# Altium PCB 电流环PCB.PcbDoc
Units mil, origin at the board's own origin, x right, y up, seen from the top; angles counter-clockwise.
Board outline 2585.03 x 1559.03 mil, 2 copper layers (Top Layer, Bottom Layer); 23 components, 15 nets, 75 pads, 0 vias.
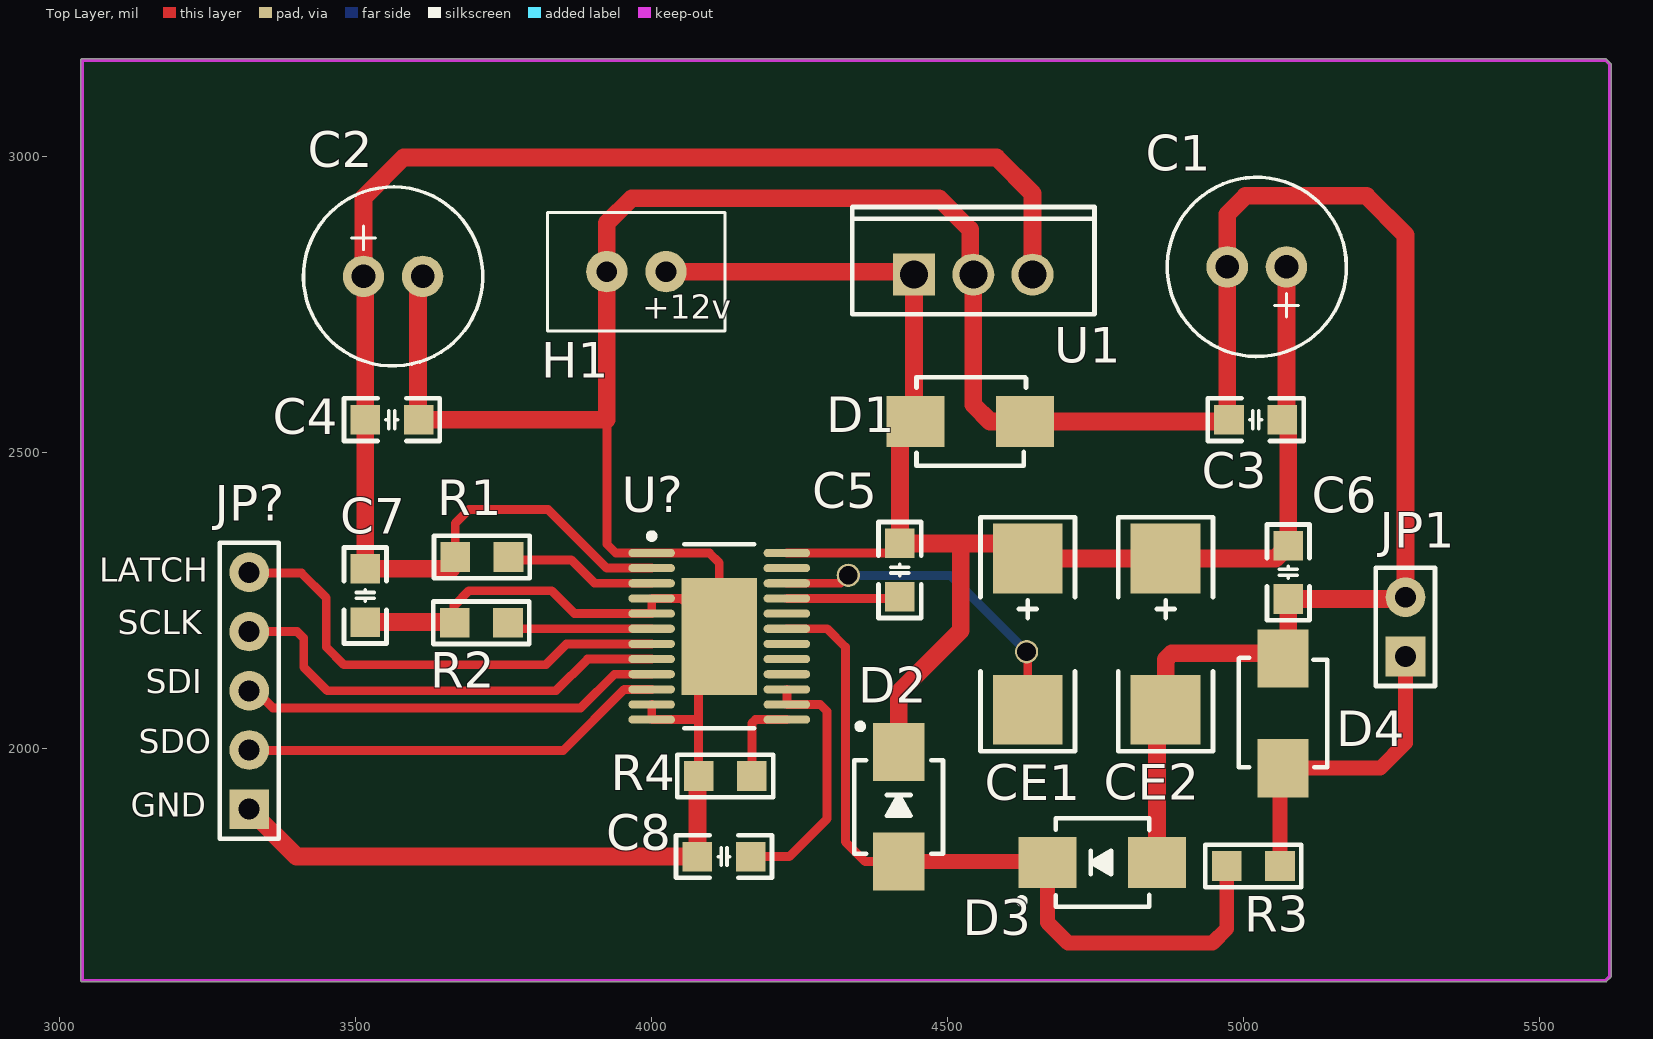
[diagram p0: Top Layer view]
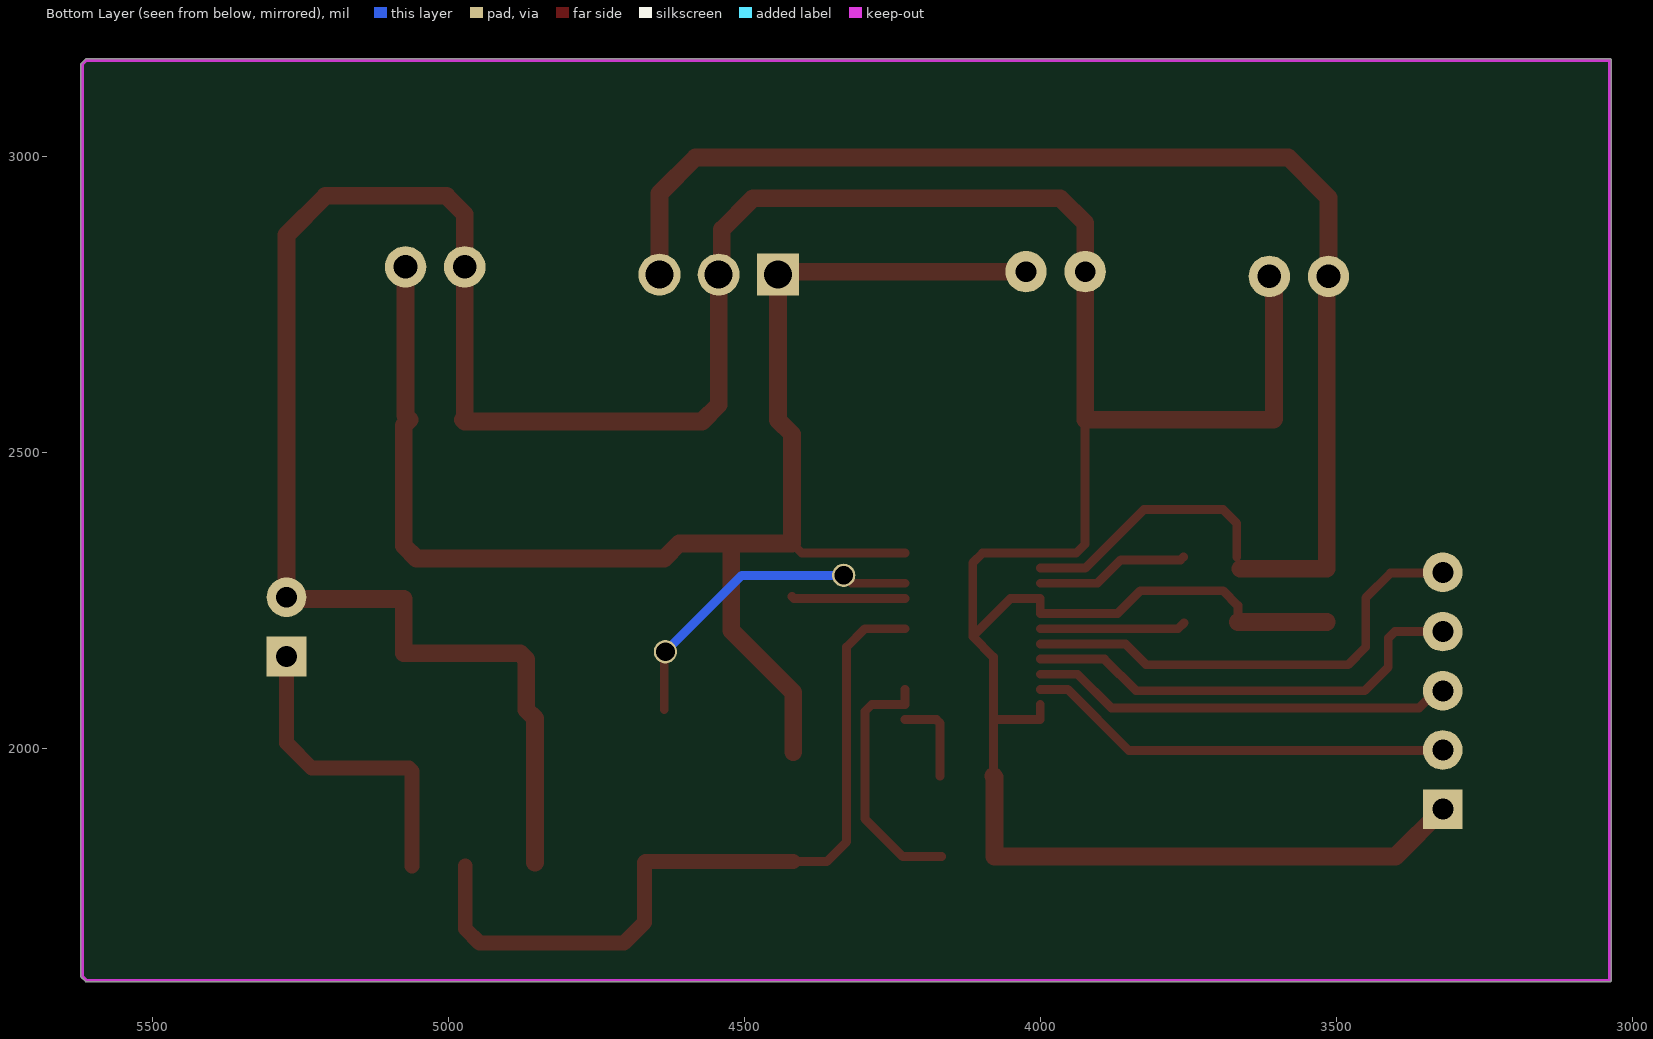
[diagram p1: Bottom Layer view, seen from below]

## Layer stack, top to bottom
Top Layer: signal copper 1.4
Dielectric: dielectric 12.6, FR-4, Dk 4.8
Bottom Layer: signal copper 1.4

## Board outline
3036.49,1609 ccw(c3039,1609) 3039,1606.48 5612,1606.48 ccw(c5612,1609) 5613.78,1607.22 5620.78,1614.22 ccw(c5619,1616) 5621.52,1616 5621.52,3156 ccw(c5619,3156) 5620.78,3157.78 5613.78,3164.78 ccw(c5612,3163) 5612,3165.51 3039,3165.51 ccw(c3039,3163) 3036.49,3163

## Design rules (kind name [scope] priority, off if disabled: settings)
Clearance [All] p1: gap=10
PolygonConnect [All] p1: connectstyle=Relief reliefconductorwidth=10 reliefentries=4 polygonreliefangle="90 Angle" airgapwidth=10
RoutingVias [All] p1: holewidth=28 width=50 viastyle="Through Hole" minholewidth=28 minwidth=50 maxholewidth=28 maxwidth=50
SolderMaskExpansion [All] p1: expansion=4
Width Width_1 [InNetClass('ELSE')] p1: maxlimit=25 minlimit=15 preferedwidth=15 minimp=50.000000 maximp=50.000000 favimp=50.000000
Width [InNetClass('POWER')] p2: maxlimit=30 minlimit=15 preferedwidth=30 minimp=50.000000 maximp=50.000000 favimp=50.000000
28 further rules are at their usual default settings.

## Classes and differential pairs
net class POWER: +5V +12V GND
net class ELSE: NetC5_1 NetC8_2 NetCE1_2 NetD2_1 NetD4_2 NetJP?_2 NetJP?_3 NetJP?_4 NetJP?_5 NetR1_2 NetR2_2 NetR4_2

## Components (designator, comment, footprint, x,y, rotation, side; value= is the part's Value field where it differs from the comment)
C1 "CAP" "220UF polar cap" 5073,2814 r180 top
C2 "CAP" "220UF polar cap" 3514,2798 r0 top
C3 "104" "C 0805_M" 5021,2556 r0 top
C4 "104" "C 0805_M" 3562,2556 r180 top
C5 "104" "C 0805_M" 4420,2302 r90 top
C6 "104" "C 0805_M" 5076,2298 r90 top
C7 "104" "C 0805_M" 3517,2259 r90 top
C8 "104" "C 0805_M" 4123,1818 r0 top
CE1 "10uF" C钽电容7mm*4mm 4636,2241 r270 top
CE2 "10uF" C钽电容7mm*4mm 4869,2241 r270 top
D1 "TVS" tvs 4533,2550 r180 top
D2 "SS38" SWB 4418,1908 r90 top
D3 "SS38" SWB 4756,1808 r180 top
D4 "TVS" tvs 5070,2054 r270 top
H1 "CH2" CH2座 4025,2806 r180 top
JP1 "HDR-1X2" HDR2.54-LI-2P 5274,2206 r90 top
JP? "HDR-1X5" HDR2.54-LI-5P 3321,2098 r90 top
R1 "10K" "R 0805_M" 3714,2324 r0 top
R2 "1K" "R 0805_M" 3713,2213 r0 top
R3 "20" "R 0805_M" 5017,1802 r0 top
R4 "1K" "R 0805_M" 4125,1954 r0 top
U1 "L7805CP" ISOWATT220AB 4544,2801 r0 top
U? "AD5410" AD5410 4115,2190 r0 top

## Footprints (in the part's own frame and the unit in brackets; to place one, negate y for a bottom-side part, rotate by r counter-clockwise, add the part's x,y. Pads: shape width x height; smd on the part's side, far side on the other; paste and mask are expansions set on the pad)
"220UF polar cap" [mil]
  round 70 hole 40: 1(0,0) 2(100,0)
  silkscreen extent -101,-151 201,151
AD5410 [mm]
  oval 2x0.35 smd: 1(-2.9,3.575) 2(-2.9,2.925) 3(-2.9,2.275) 4(-2.9,1.625) 5(-2.9,0.975) 6(-2.9,0.325) 7(-2.9,-0.325) 8(-2.9,-0.975) 9(-2.9,-1.625) 10(-2.9,-2.275) 11(-2.9,-2.925) 12(-2.9,-3.575) 13(2.9,-3.575) 14(2.9,-2.925) 15(2.9,-2.275) 16(2.9,-1.625) 17(2.9,-0.975) 18(2.9,-0.325) 19(2.9,0.325) 20(2.9,0.975) 21(2.9,1.625) 22(2.9,2.275) 23(2.9,2.925) 24(2.9,3.575)
  rect 3.25x5.02 smd: 25(0,0)
  silkscreen extent -3.02,-3.95 1.5,4.42, body extent -2.25,-3.95 2.25,3.95, height 1.2
"C 0805_M" [mil] "无极性贴片电容   用这个"
  rect 50x50 smd: 1(-45,0) 2(45,0)
  silkscreen extent -81,-36 81,36, body extent -39,-24 39,24, height 20
CH2座 [mil]
  round 70 hole 35: 1(0,0) 2(100,0)
  silkscreen extent -100,-100 200,100
C钽电容7mm*4mm [mm] "E106钽电容"
  rect 3x3 smd: 1(-2.048,0) 2(4.445,0)
  silkscreen extent -3.81,-2.03 6.22,2.03
HDR2.54-LI-2P [mm] "封装库来自淘宝卖家 ID：黄晶宝石"
  rect 1.7x1.7 hole 0.9: 1(-1.27,0)
  round 1.7 hole 0.9: 2(1.27,0)
  silkscreen extent -2.54,-1.27 2.54,1.27, body extent -2.54,-1.27 2.54,1.27, height 8.5
HDR2.54-LI-5P [mm] "排针，5脚"
  rect 1.7x1.7 hole 0.9: 1(-5.08,0)
  round 1.7 hole 0.9: 2(-2.54,0) 3(0,0) 4(2.54,0) 5(5.08,0)
  silkscreen extent -6.35,-1.27 6.35,1.27, body extent -6.35,-1.27 6.35,1.27, height 8.5
ISOWATT220AB [mm] "TO, Thru-Hole, Vertical, Heatsink Mounted; 3 In-Line Leads; Pitch 2.54 mm; Pin sequence 1, 3, 2"
  rect 1.8x1.8 hole 1.2: 1(-2.54,0)
  round 1.8 hole 1.2: 2(2.54,0) 3(0,0)
  silkscreen extent -5.2,-1.7 5.2,2.9
"R 0805_M" [mil] "1/8W贴片电阻"
  rect 50x50 smd: 1(-45,0) 2(45,0)
  silkscreen extent -81,-36 81,36, body extent -39,-25 39,25, height 20
SWB [mm] "7.2*3.8*2.2mm(长宽高，不包括引脚）"
  rect 2.5x2.2 smd: 1(-2.5,0) 2(2.2,0)
  silkscreen extent -2.16,-1.9 3.43,1.9, body extent -2.78,-1.8 2.52,1.8, height 2.35
tvs [mm] "4*3.0*2.2mm(长宽高，不包括引脚）"
  rect 2.5x2.2 smd: 1(-2.5,-0.071) 2(2.2,-0.071)
  silkscreen extent -2.54,-1.97 2.16,1.83

## Part data
C1 C2: library part "220UF polar cap", "220UF polar cap"
C3 C4 C5 C6 C7 C8: library part C, "贴片电容"
CE1 CE2: library part CE, "直插电解电容"
D1 D4: library part SMAJ26CA, "瞬态抑制二极管(TVS)"
D2 D3: library part SS34, "肖特基二极管"
H1: library part CH2座, "CH2座"
JP1: library part "Header 2", "2P接插件"
JP?: library part "Header 5", "5P接插件"
R1 R2 R3 R4: library part R, "贴片电阻"
U1: "Positive Voltage Regulator"
U?: "电流环芯片"

## Free pads (board coordinates)
  round 39.37 hole 31.5 paste+0 mask+4: 0(4333,2293) 2(4634,2164)

## Nets (pads, with @x,y where several pads share a name; then routed paths per layer and width w, separated by ;. In a path a pad name is that pad's centre, name@x,y a point inside that pad or via, vN(x,y) a via of type N, cw(c..) or ccw(c..) an arc to the next point about the centre after c; other vN are vias at no path point)
+5V: C2.1 C4.2 C7.2 R1.1 U1.2 U?.2 | length 2538.3
  Top Layer w15: R1.1 3669,2381 3692,2404 3826,2404 3924.84,2305.16 U?.2
  Top Layer w30: C2.1@3506,2799 3517,2788 C4.2 C7.2 R1.1@3663,2304 ; C2.1 3514,2931 3582,2999 4583,2999 4644,2938 U1.2
+12V: C1.1 C3.2 C5.2 C6.2 CE1.1 CE2.1 D1.2 D2.2 H1.1 U1.1 U?.24 | length 2626.8
  Top Layer w15: U?.24 4403.75,2330.75 C5.2
  Top Layer w30: H1.1 U1.1@4439,2806 ; D2.2 4418,2095 4523,2200 4523,2342 4518,2347 ; U1.1 4444,2555.18 4420,2531.18 C5.2 4518,2347 ; C1.1 5073,2563 C3.2 5076,2546 C6.2 5054.63,2321.63 CE2.1 CE1.1 4610.63,2347 4518,2347
GND: C1.2 C2.2 C3.1 C4.1 C6.1 C7.1 C8.1 CE2.2 D1.1 D3.1 D4.1 H1.2 JP1.2 JP?.1 R2.1 R4.1 U1.3 U?.1 U?.4 U?.5 U?.11 U?.12 U?.25 | length 6961.5
  Top Layer w15: R2.1@3667,2214 3667,2242 3692,2267 3832,2267 3870.61,2228.39 U?.5 U?.4 4051.02,2253.98 U?.25 ; 3925,2556 3925,2346 3940.25,2330.75 U?.1 4098.25,2330.75 4115,2314 U?.25 ; U?.11 U?.12 4078.25,2049.25 4080,2051 ; R4.1 4080,2051 ; 4080,2051 4080,2155 U?.25
  Top Layer w30: JP?.1 3401,1818 C8.1 4078,1952 R4.1 ; C7.1 R2.1@3667,2214 ; C4.1@3606,2557 C2.2@3606,2799 ; C4.1 3925,2556 H1.2 3925,2888 3967,2930 4486,2930 4539,2877 4539,2806 U1.3 4544,2581 4572.19,2552.81 D1.1 4972.81,2552.81 C3.1 ; D3.1 4854.42,2051.42 CE2.2 4869,2151 4879.22,2161.22 5076,2161.22 C6.1 5271,2253 JP1.2 5274,2868 5208,2934 5004,2934 4973,2903 C1.2 C3.1@4973,2559
NetC5_1: C5.1 U?.21 | length 192.1
  Top Layer w15: U?.21 4416.98,2253.98 C5.1
NetC8_2: C8.2 U?.14 U?.15 | length 434.8
  Top Layer w15: C8.2 4233,1818 4297,1882 4297,2063 4285.16,2074.84 U?.14 U?.15
NetCE1_2: CE1.2 pad.0 pad.2 U?.22 | length 562.7
  Top Layer w15: U?.22 4319.57,2279.57 pad.0 ; pad.2 4636,2162 CE1.2
  Bottom Layer w15: pad.0 4505,2293 pad.2
NetD2_1: D2.1 D3.2 R3.1 U?.19 | length 1330.7
  Top Layer w15: U?.19 4297.2,2202.8 4328,2172 4328,1843 4361.42,1809.58 D2.1
  Top Layer w25: D2.1 4667.8,1809.58 D3.2 4669.38,1706.62 4704,1672 4948,1672 4972,1696 R3.1
NetD4_2: D4.2 JP1.1 R3.2 | length 538
  Top Layer w25: R3.2 5062,1962.18 D4.2 5231.38,1967.38 5274,2010 JP1.1
NetJP?_2: JP?.2 U?.10 | length 710.7
  Top Layer w15: JP?.2@3333,1997 3851,1997 3954.43,2100.43 U?.10
NetJP?_3: JP?.3 U?.9 | length 703
  Top Layer w15: JP?.3@3333,2097 3361,2069 3881,2069 3938.02,2126.02 U?.9
NetJP?_4: JP?.4 U?.8 | length 772.2
  Top Layer w15: JP?.4 3402,2198 3413,2187 3413,2138 3453,2098 3839,2098 3892.61,2151.61 U?.8
NetJP?_5: JP?.5 U?.7 | length 795.2
  Top Layer w15: JP?.5@3333,2297 3409,2297 3451,2255 3451,2172 3481,2142 3822,2142 3857.2,2177.2 U?.7
NetR1_2: R1.2 U?.3 | length 260.2
  Top Layer w15: R1.2 3764,2319 3865,2319 3904.43,2279.57 U?.3
NetR2_2: R2.2 U?.6 | length 247.1
  Top Layer w15: R2.2 3768.2,2202.8 U?.6
NetR4_2: R4.2 U?.13 | length 150.8
  Top Layer w15: R4.2 4170,2043 4176.25,2049.25 U?.13
pads on no net: U?.16 U?.17 U?.18 U?.20 U?.23

## Keep-outs
Keep-Out Layer:
  lines w5: 3039,1609 5612,1609 5619,1616 5619,3156 5612,3163 3039,3163 3039,1609

## Silkscreen, mask and mechanical layers (free items; w line width, h text height)
Top Overlay:
  text "+12v" at 3985,2713 h70
  text "LATCH" at 3068,2269 h70
  text "SCLK" at 3099,2180 h70
  text "SDI" at 3146,2080 h70
  text "SDO" at 3134,1979 h70
  text "GND" at 3121,1872 h70